# Altium PCB PCB1.PcbDoc
Units mil, origin at the board's own origin, x right, y up, seen from the top; angles counter-clockwise.
Board outline 6000 x 4000 mil, 2 copper layers (Top Layer, Bottom Layer); 85 components, 86 nets, 277 pads, 0 vias.
Unrouted connection lines stored in the file: 182.
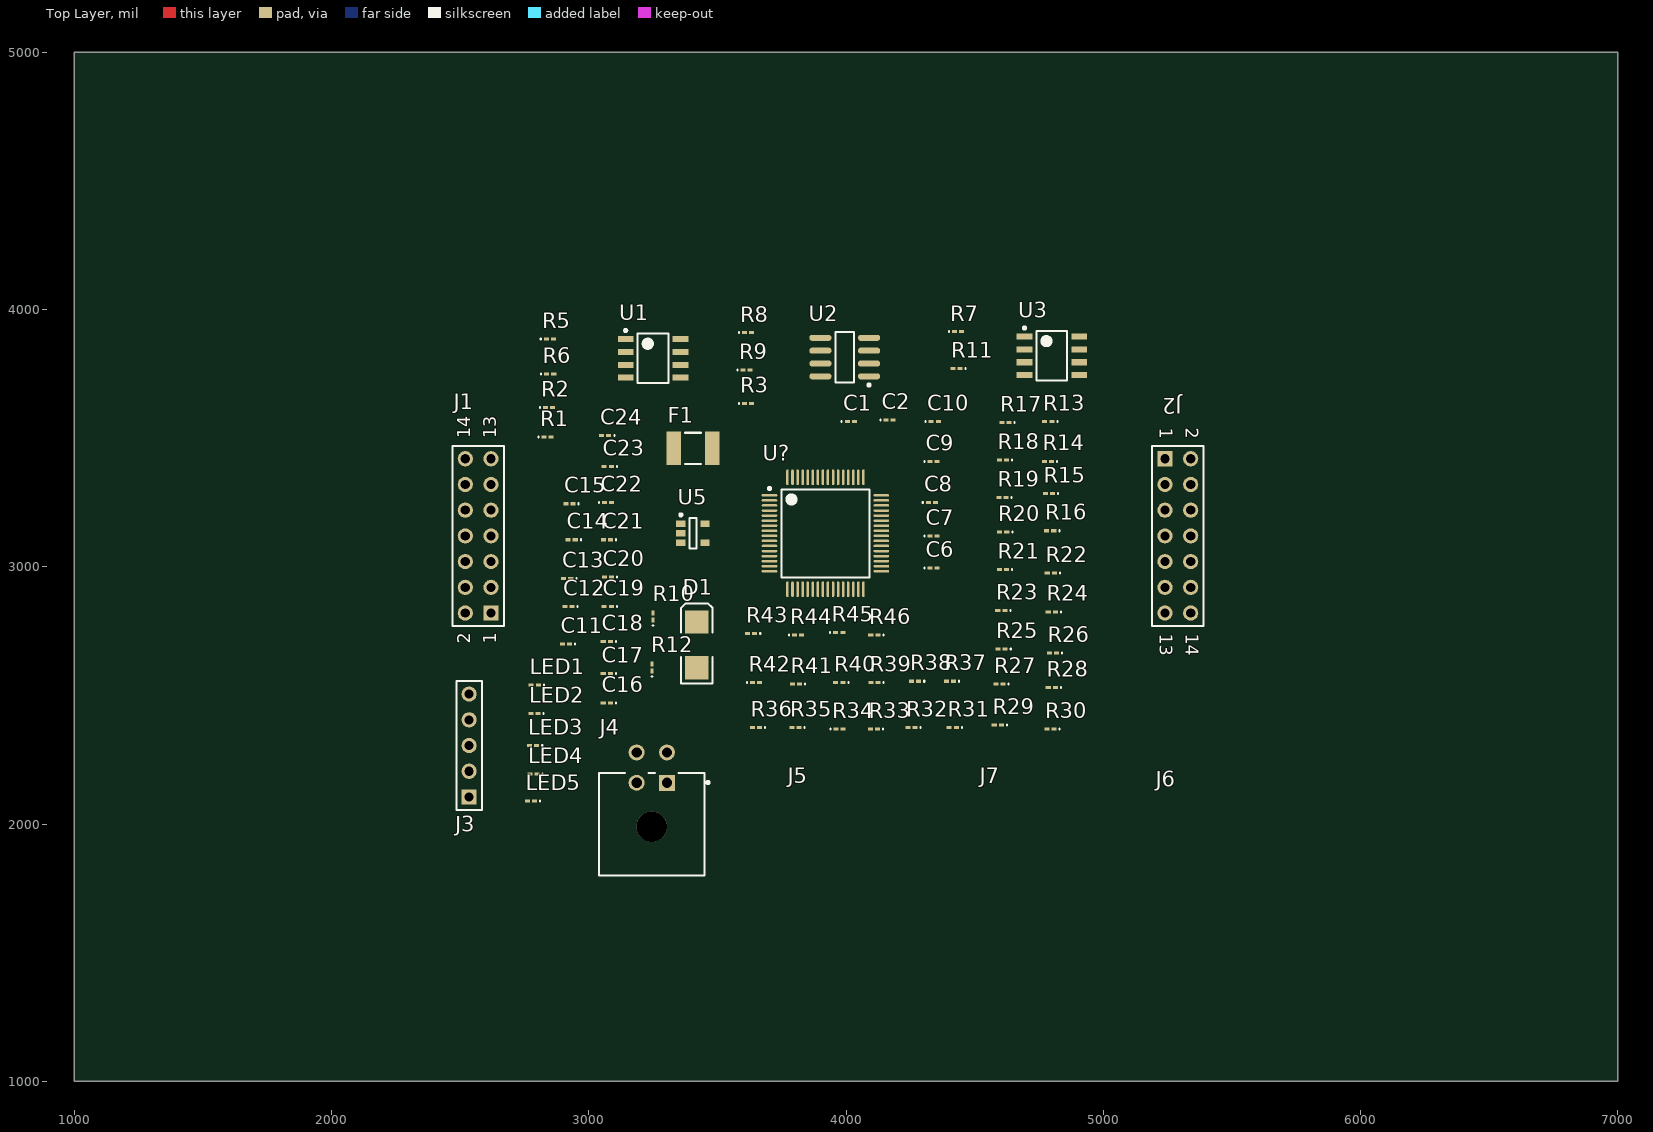
[diagram p0: Top Layer view]
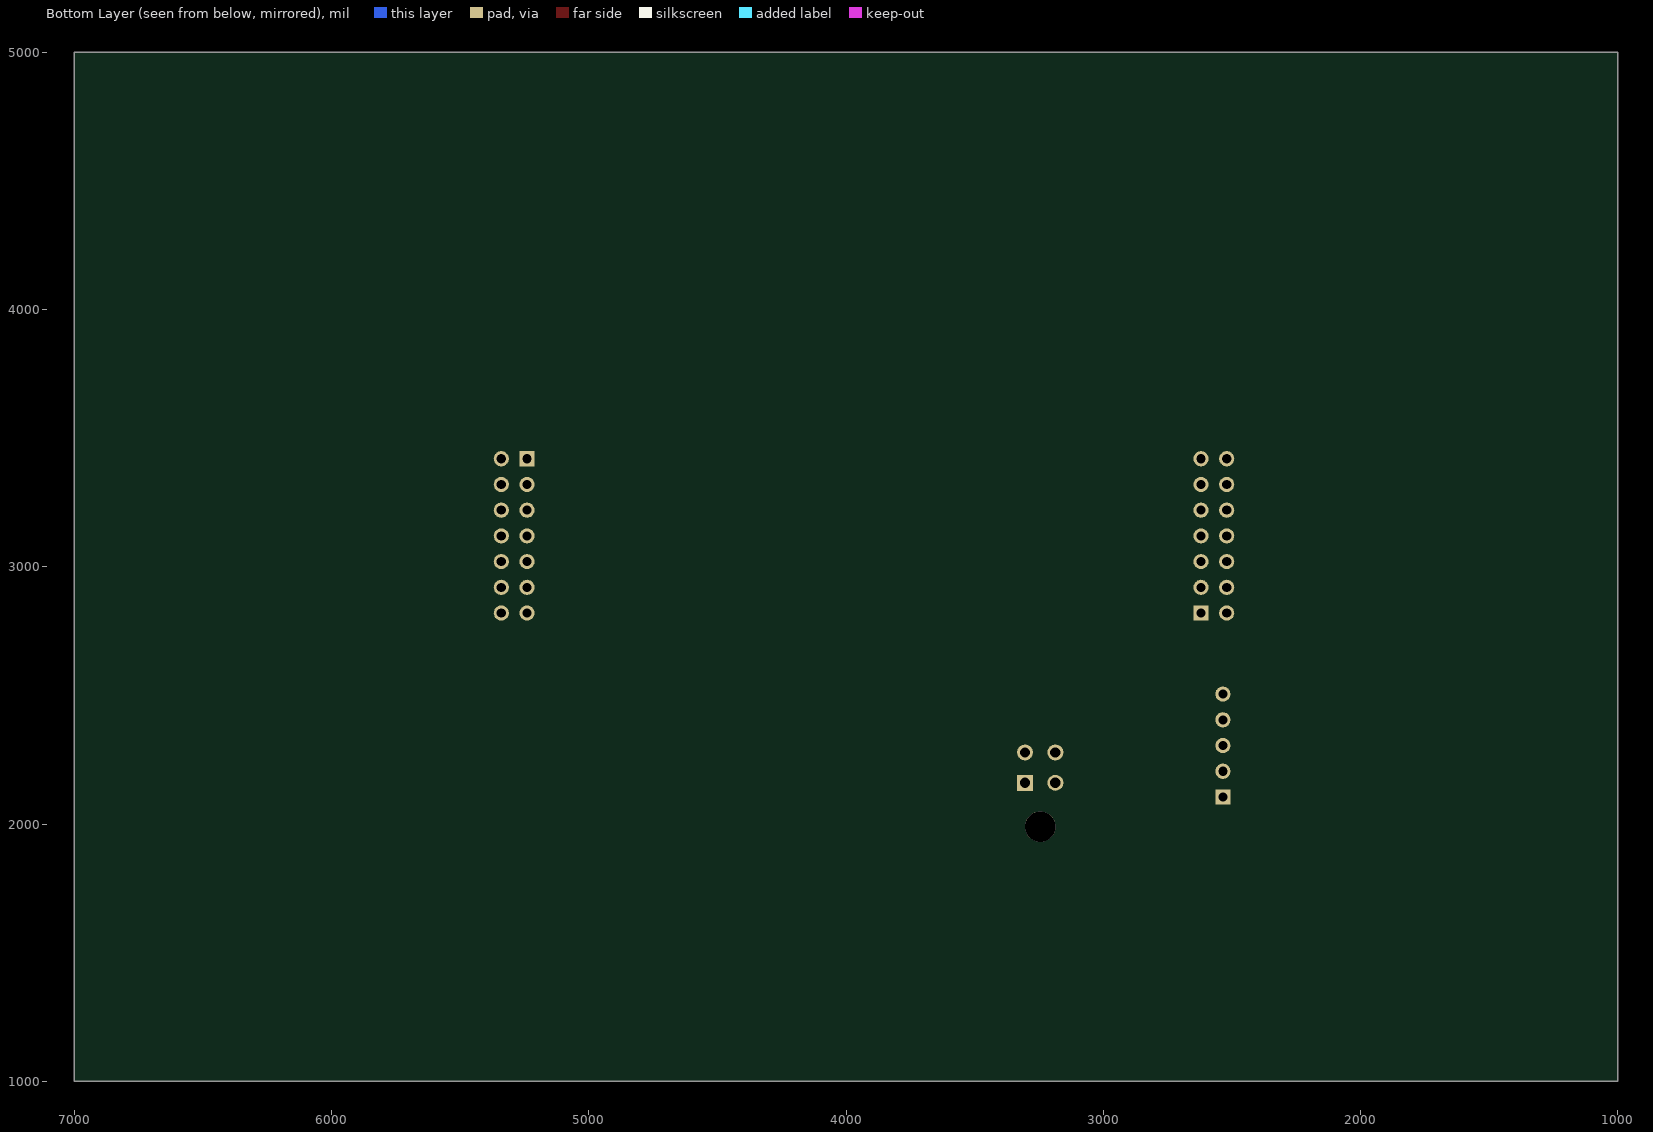
[diagram p1: Bottom Layer view, seen from below]

## Layer stack, top to bottom
Top Solder: solder mask 0.4, Solder Resist, Dk 3.5
Top Layer: signal copper 1.4
Dielectric 1: dielectric 12.6, FR-4, Dk 4.8
Bottom Layer: signal copper 1.4
Bottom Solder: solder mask 0.4, Solder Resist, Dk 3.5

## Board outline
1000,1000 7000,1000 7000,5000 1000,5000

## Design rules (kind name [scope] priority, off if disabled: settings)
Clearance [All] p1: gap=10 ignorepadtopadclearanceinfootprint=FALSE except(0: Arc-Hole Track-Hole SMDPad-Hole THPad-Hole Via-Hole Fill-Hole Poly-Hole Region-Hole Text-Hole)
PolygonConnect [All] p1: connectstyle=Relief reliefconductorwidth=10 reliefentries=4 polygonreliefangle="90 Angle" airgapwidth=10
RoomDefinition LAB2 [InComponentClass('LAB2')] p1: confinementstyle=ConfineIn formatcopy=TRUE lockcomponents=FALSE outline 7045,1060 26955,1060 26955,2065 7045,2065
RoutingVias [All] p1: holewidth=28 width=50 viastyle="Through Hole" minholewidth=28 minwidth=50 maxholewidth=28 maxwidth=50
SolderMaskExpansion [All] p1: expansion=4
Width [All] p1: maxlimit=10 minlimit=10 preferedwidth=10
30 further rules are at their usual default settings.

## Components (designator, comment, footprint, x,y, rotation, side; value= is the part's Value field where it differs from the comment)
C1 "100n" 0603 4018.78,3565 r0 top
C2 "4n7" 0603 4168.78,3570 r0 top value=100n
C6 "100n" 0603 4340,2995 r0 top
C7 "100p" 0603 4340,3120 r0 top value=100pF
C8 "100n" 0603 4333.78,3250 r0 top
C9 "4n7" 0603 4340,3410 r0 top value=100n
C10 "100n" 0603 4345,3565 r0 top
C11 "100n" 0603 2911.22,2700 r180 top
C12 "100n" 0603 2921.22,2845 r180 top
C13 "100n" 0603 2916.22,2955 r180 top
C14 "100n" 0603 2933.78,3105 r180 top
C15 "100n" 0603 2925,3245 r180 top
C16 "100n" 0603 3070,2470 r180 top
C17 "27p" 0603 3070,2585 r180 top value=100n
C18 "27p" 0603 3070,2710 r180 top value=100n
C19 "100n" 0603 3073.78,2845 r180 top
C20 "100n" 0603 3075,2960 r180 top
C21 "100n" 0603 3071.22,3105 r180 top
C22 "100n" 0603 3075,3250 r0 top
C23 "100n" 0603 3073.78,3390 r180 top
C24 "10n" 0603 3063.78,3510 r180 top value=100pF
D1 "P6SMB15A" SMB 3420,2696.42 r90 top
F1 "Fuse 1" 1812 3405,3460 r0 top
J1 "Header 7X2" HDR2X7 2620,2820 r90 top
J2 "Header 7X2" HDR2X7 5240,3420 r270 top
J3 "ZL201" HDR1X5 2535,2105 r90 top
J4 "MX-43045-0400" FP-43045-0400-MFG 3245,2003.98 r0 top
J5 "MX-43045-0800" FP-35507-0400-MFG 3980,1960 r0 top
J6 "MX-43045-0600" PCBComponent_1 2580,6310 r90 top
J7 "MX-43045-0600" FP-35507-0400-MFG 4725,1960 r0 top
LED1 "HCL-1904AYL" 0603 2790,2540 r180 top
LED2 "HCL-1903BG4" 0603 2788.78,2430 r180 top
LED3 "HCL-1906BR1" 0603 2783.78,2305 r180 top
LED4 "HCL-1904AYL" 0603 2785,2195 r180 top
LED5 "HCL-1906BR1" 0603 2775,2090 r180 top
R1 "CAN0001" 0603 2840,3505 r0 top
R2 "CAN0001" 0603 2845,3620 r0 top
R3 "nc" 0603 3618.78,3635 r0 top value=1K
R5 "4k7" 0603 2848.78,3885 r0 top value=1K
R6 "1k" 0603 2850,3750 r0 top value=1K
R7 "3k6 1%" 0603 4435,3915 r0 top value=1K
R8 "68" 0603 3618.78,3910 r0 top value=1K
R9 "68" 0603 3613.78,3765 r0 top value=1K
R10 "1M" 0603 3250,2806.22 r90 top value=1K
R11 "1k2 1%" 0603 4430,3770 r180 top value=1K
R12 "4k7" 0603 3245,2608.78 r90 top value=1K
R13 "CAN0001" 0603 4786.22,3565 r180 top
R14 "CAN0001" 0603 4785,3410 r180 top
R15 "1k8" 0603 4788.78,3285 r180 top value=1K
R16 "nc" 0603 4793.78,3140 r180 top value=1K
R17 "4k7" 0603 4620,3560 r180 top value=1K
R18 "1k" 0603 4610,3415 r180 top value=1K
R19 "68" 0603 4608.78,3270 r180 top value=1K
R20 "68" 0603 4611.22,3135 r180 top value=1K
R21 "10k" 0603 4610,2990 r180 top value=1K
R22 "10k" 0603 4796.22,2975 r180 top value=1K
R23 "1k" 0603 4603.78,2830 r180 top value=1K
R24 "4k7" 0603 4800,2825 r180 top value=1K
R25 "10k" 0603 4605,2680 r180 top value=1K
R26 "10k" 0603 4805,2665 r180 top value=1K
R27 "1k" 0603 4596.22,2545 r180 top value=1K
R28 "4k7" 0603 4800,2530 r180 top value=1K
R29 "10k" 0603 4590,2385 r180 top value=1K
R30 "1k8" 0603 4795,2370 r180 top value=1K
R31 "10k" 0603 4415,2375 r180 top value=1K
R32 "1k" 0603 4255,2375 r180 top value=1K
R33 "nc" 0603 4108.78,2370 r180 top value=1K
R34 "4k7" 0603 3975,2370 r0 top value=1K
R35 "4k7" 0603 3803.78,2375 r180 top value=1K
R36 "10k" 0603 3650,2375 r180 top value=1K
R37 "10k" 0603 4403.78,2555 r180 top value=1K
R38 "10k" 0603 4268.78,2555 r180 top value=1K
R39 "470" 0603 4111.22,2550 r180 top value=1K
R40 "1k" 0603 3973.78,2550 r180 top value=1K
R41 "1k" 0603 3805,2545 r180 top value=1K
R42 "4k7" 0603 3650,2550 r0 top value=1K
R43 "10k" 0603 3631.22,2740 r180 top value=1K
R44 "4k7" 0603 3813.78,2735 r0 top value=1K
R45 "4k7" 0603 3973.78,2745 r0 top value=1K
R46 "4k7" 0603 4110,2735 r180 top value=1K
U1 "MCP2551-I/SN" MCHP-SN8_V 3250,3810 r0 top
U2 "MC33063AD" SO8_N 3995,3815 r180 top
U3 "MCP2551-I/SN" MCHP-SN8_V 4800,3820 r0 top
U5 "MCP1320-46LT" SOT23-5L_L 3405,3130 r0 top
U? "DSPIC30F5011-30I/PT" TQFP-PT64_L 3920,3130 r0 top

## Footprints (in the part's own frame and the unit in brackets; to place one, negate y for a bottom-side part, rotate by r counter-clockwise, add the part's x,y. Pads: shape width x height; smd on the part's side, far side on the other; paste and mask are expansions set on the pad)
0603 [mm] "Chip Inductor, Body 0.6x0.3mm, IPC High Density"
  rect 0.5x0.3 smd: 1(-0.35,0) 2(0.35,0)
  silkscreen extent -0.9,-0.05 -0.9,0.05, body extent -0.33,-0.18 0.33,0.18, height 0.55
1812 [mm] "Chip Capacitor, Body 4.5x3.2mm, IPC High Density"
  rect 1.4x3.3 smd: 1(-1.9,0) 2(1.9,0)
  silkscreen extent -0.8,-1.55 0.8,1.55, body extent -2.4,-1.7 2.4,1.7, height 1.4
FP-35507-0400-MFG [mil]
  body extent -212,-163 212,163, height 10
FP-43045-0400-MFG [mm]
  rect 1.57x1.57 hole 1.02 paste-1000 mask+0: 1(1.5,3.965)
  round 1.57 hole 1.02 paste-1000 mask+0: 2(-1.5,3.965) 3(1.5,6.965) 4(-1.5,6.965)
  round 3 hole 3 unplated paste-1000 mask+0: ""(0,-0.355)
  silkscreen extent -5.2,-5.21 5.68,4.95, body extent -5.3,-5.31 5.3,7.85, height 0.25
HDR1X5 [mm] "Connector; Header; 5 Position"
  rect 1.5x1.5 hole 0.9: 1(0,0)
  round 1.5 hole 0.9: 2(2.54,0) 3(5.08,0) 4(7.62,0) 5(10.16,0)
  silkscreen extent -1.27,-1.27 11.43,1.27
HDR2X7 [mm] "Connector; Header; 7x2 Position"
  rect 1.5x1.5 hole 0.9: 1(0,0)
  round 1.5 hole 0.9: 2(0,2.54) 3(2.54,0) 4(2.54,2.54) 5(5.08,0) 6(5.08,2.54) 7(7.62,0) 8(7.62,2.54) 9(10.16,0) 10(10.16,2.54) 11(12.7,0) 12(12.7,2.54) 13(15.24,0) 14(15.24,2.54)
  silkscreen extent -1.27,-1.27 16.51,3.81
MCHP-SN8_V [mm] "SOIC, 8-Leads, Body 4.9x3.9mm, Pitch 1.27mm"
  rect 1.55x0.6 smd: 1(-2.7,1.905) 2(-2.7,0.635) 3(-2.7,-0.635) 4(-2.7,-1.905) 5(2.7,-1.905) 6(2.7,-0.635) 7(2.7,0.635) 8(2.7,1.905)
  silkscreen extent -2.82,-2.45 1.53,2.88, body extent -3,-2.45 3,2.45, height 1.75
PCBComponent_1 [mil]
SMB [mm] "DO-214-AA/SMB; 2 C-Bend Leads; Body 5.3 x 3.6 mm, inc. leads (LxW)"
  rect 2.3x2.3 smd: 1(-2.25,0) 2(2.25,0)
  silkscreen extent -3.8,-1.55 4.1,1.55
SO8_N [mm] "SOIC, 8-Leads, Body 4.9x3.9mm, Pitch 1.27mm, IPC Medium Density"
  oval 2.2x0.6 smd: 1(-2.4,1.905) 2(-2.4,0.635) 3(-2.4,-0.635) 4(-2.4,-1.905) 5(2.4,-1.905) 6(2.4,-0.635) 7(2.4,0.635) 8(2.4,1.905)
  silkscreen extent -2.53,-2.5 0.9,2.88, body extent -2,-2.5 2,2.5, height 1.75
SOT23-5L_L [mm] "SOT23, 5-Leads, Body 2.9x1.6mm, Pitch 0.95mm, Lead Span 2.8mm, IPC High Density"
  rect 0.9x0.65 smd: 1(-1.2,0.95) 2(-1.2,0) 3(-1.2,-0.95) 4(1.2,-0.95) 5(1.2,0.95)
  silkscreen extent -1.32,-1.5 0.35,1.95, body extent -0.87,-1.5 0.87,1.5, height 1.45
TQFP-PT64_L [mm] "Thin QFP, 64-Leads, Body 10x10mm, Pitch 0.5mm, IPC High Density"
  oval 1.55x0.25 smd: 1(-5.525,3.75) 2(-5.525,3.25) 3(-5.525,2.75) 4(-5.525,2.25) 5(-5.525,1.75) 6(-5.525,1.25) 7(-5.525,0.75) 8(-5.525,0.25) 9(-5.525,-0.25) 10(-5.525,-0.75) 11(-5.525,-1.25) 12(-5.525,-1.75) 13(-5.525,-2.25) 14(-5.525,-2.75) 15(-5.525,-3.25) 16(-5.525,-3.75) 33(5.525,-3.75) 34(5.525,-3.25) 35(5.525,-2.75) 36(5.525,-2.25) 37(5.525,-1.75) 38(5.525,-1.25) 39(5.525,-0.75) 40(5.525,-0.25) 41(5.525,0.25) 42(5.525,0.75) 43(5.525,1.25) 44(5.525,1.75) 45(5.525,2.25) 46(5.525,2.75) 47(5.525,3.25) 48(5.525,3.75)
  oval 0.25x1.55 smd: 17(-3.75,-5.525) 18(-3.25,-5.525) 19(-2.75,-5.525) 20(-2.25,-5.525) 21(-1.75,-5.525) 22(-1.25,-5.525) 23(-0.75,-5.525) 24(-0.25,-5.525) 25(0.25,-5.525) 26(0.75,-5.525) 27(1.25,-5.525) 28(1.75,-5.525) 29(2.25,-5.525) 30(2.75,-5.525) 31(3.25,-5.525) 32(3.75,-5.525) 49(3.75,5.525) 50(3.25,5.525) 51(2.75,5.525) 52(2.25,5.525) 53(1.75,5.525) 54(1.25,5.525) 55(0.75,5.525) 56(0.25,5.525) 57(-0.25,5.525) 58(-0.75,5.525) 59(-1.25,5.525) 60(-1.75,5.525) 61(-2.25,5.525) 62(-2.75,5.525) 63(-3.25,5.525) 64(-3.75,5.525)
  silkscreen extent -5.65,-4.35 4.35,4.55, body extent -5,-5 5,5, height 1.6

## Part data
C1 C2 C6 C7 C8 C9 C10 C11 C12 C13 C14 C15 C16 C17 C18 C19 C20 C21 C22 C23 C24: library part Cap, "Capacitor", LatestRevisionDate=17-Jul-2002, LatestRevisionNote="Re-released for DXP Platform.", PackageReference=RAD-0.3, Published=8-Jun-2000, Publisher="Altium Limited"
D1: library part "D Zener", "Zener Diode", LatestRevisionDate=17-Jul-2002, LatestRevisionNote="Re-released for DXP Platform.", PackageReference=DIODE-0.7, Published=8-Jun-2000, Publisher="Altium Limited"
F1: "Fuse", LatestRevisionDate=17-Jul-2002, LatestRevisionNote="Re-released for DXP Platform.", PackageReference=PIN-W2/E2.8, Published=8-Jun-2000, Publisher="Altium Limited"
J1 J2: "Header, 7-Pin, Dual row", LatestRevisionDate=17-Jul-2002, LatestRevisionNote="Re-released for DXP Platform.", Publisher="Altium Limited"
J3: library part CON5, "Connector"
J4: library part "Header 2X2", "Header, 2-Pin, Dual row", LatestRevisionDate=17-Jul-2002, LatestRevisionNote="Re-released for DXP Platform.", Publisher="Altium Limited"
J5: library part "Header 4X2A", "Header, 4-Pin, Dual row", LatestRevisionDate=17-Jul-2002, LatestRevisionNote="Re-released for DXP Platform.", Publisher="Altium Limited"
J6 J7: library part "Header 6", "Header, 6-Pin", LatestRevisionDate=17-Jul-2002, LatestRevisionNote="Re-released for DXP Platform.", Publisher="Altium Limited"
LED1 LED2 LED3 LED4 LED5: library part LED3, "Typical BLUE SiC LED", Published=8-Jun-2000, Publisher="Altium Limited", Revision 1="Jul-2002: Re-released for DXP Platform.", Revision 2="17-Dec-2003: PCB Footprint replaced."
R1 R2 R13 R14: library part "Res Varistor", "Varistor (Voltage-Sensitive Resistor)", LatestRevisionDate=04-Mar-2005, LatestRevisionNote="PCB Footprint replaced.", PackageReference=6-0805, Published=24-Mar-1999, Publisher="Altium Limited"
R3 R5 R6 R7 R8 R9 R10 R11 R12 R15 R16 R17 R18 R19 R20 R21 R22 R23 R24 R25 R26 R27 R28 R29 R30 R31 R32 R33 R34 R35 R36 R37 R38 R39 R40 R41 R42 R43 R44 R45 R46: library part Res2, "Resistor", LatestRevisionDate=17-Jul-2002, LatestRevisionNote="Re-released for DXP Platform.", PackageReference=AXIAL-0.4, Published=8-Jun-2000, Publisher="Altium Limited"
U1 U3: "High Speed CAN Transceiver, 8-Pin Plastic SOIC, Industrial Grade", Code_JEDEC=MS-012, ComponentLink1Description="Manufacturer Link", ComponentLink1URL=http://www.microchip.com, ComponentLink2Description=Datasheet, ComponentLink2URL=http://ww1.microchip.com/downloads/en/DeviceDoc/21667d.pdf, DatasheetVersion=Nov-2003, LatestRevisionDate=13-Apr-2006, LatestRevisionNote="IPC-7351 Footprint Added.", PackageDescription="8-Pin Plastic Narrow Body Small Outline Integrated Circuit 1.27 mm Pitch", PackageReference=SOIC150-8, PackageVersion=Oct-2005, Published=6-Oct-2005, Publisher="Altium Limited"
U2: "DC-to-DC Converter Control Circuit", Code_IPC=SOIC127P600-8, Code_JEDEC=MS-012-AA, ComponentLink1Description="Manufacturer Link", ComponentLink1URL=http://www.onsemi.com/site/products/taxonomy/0,4438,503,00.html, ComponentLink2Description=Datasheet, ComponentLink2URL=http://www.onsemi.com/pub/Collateral/MC34063A-D.PDF, DatasheetVersion=1988, LatestRevisionDate=13-Apr-2006, LatestRevisionNote="IPC-7351 Footprint Added.", PackageDescription="8-Pin Small Outline Integrated Circuit 1.27 mm Pitch", PackageReference=751-02, Published=17-Jul-2002, Publisher="Altium Limited"
U5: library part MCP1320
U?: library part CMP-0044-00148-1, "High-Performance 16-bit Digital Signal Controller, 66 KB Flash, 4 KB SRAM, 1 KB EEPROM, 64-Pin TQFP, Industrial Temperature", Code_JEDEC=MS-026, DatasheetVersion="revH, Jun-2008", PackageDescription="64-Lead Thin Plastic Quad Flat Pack (PT) - 10x10x1mm Body, 2.00mm [TQFP]", PackageReference=TQFP-PT64, PackageVersion="revBB, Aug-2009"

## Nets (pads, with @x,y where several pads share a name; then routed paths per layer and width w, separated by ;. In a path a pad name is that pad's centre, name@x,y a point inside that pad or via, vN(x,y) a via of type N, cw(c..) or ccw(c..) an arc to the next point about the centre after c; other vN are vias at no path point)
+5V: C1.1 C6.1 C8.1 C13.1 C14.1 C15.1 C16.1 C22.1 J1.2 J2.2 J2.4 J2.6 J3.2 J4.2 LED1.1 LED2.1 LED3.1 LED5.1 R7.1 R22.1 R26.1 R31.1 R36.1 R37.1 R38.1 R42.1 R43.2 U1.3 U3.3 U5.5 U?.10 U?.19 U?.26 U?.38 U?.57
+12V: D1.2 F1.2 R10.1 R12.1 U2.6
+12VPWR: F1.1
ADC0: J1.4 U?.16
ADC1: J1.6 U?.15
ADC2: J1.8 U?.14
ADC3: J1.10 U?.13
ADC4: J1.12 U?.12
ButD: C10.1 R22.2 R23.2 U?.23
ButD_IN: R23.1
ButN: C11.1 R26.2 R27.2 U?.22
ButN_IN: R27.1
ButR: C12.1 R31.2 R32.2 U?.21
ButR_IN: R32.1
CAN_BMS_RX: U3.4 U?.58
CAN_BMS_TX: R17.2 U3.1 U?.59
CAN_BMSS_H: R13.2 R20.1 U3.7
CAN_BMSS_L: R14.1 R19.1 U3.6
CAN_MUX_RX: U1.4
CAN_MUX_TX: R5.2 U1.1 U?.60
CAN_MUXED_H: R1.2 R9.1 U1.7
CAN_MUXED_L: R2.1 R8.1 U1.6
ChrgLED: R45.1 U?.29
ChrgLED_OUT: 
FluidHeater: R46.1 U?.30
FluidHeater_OUT: 
GND: C1.2 C2.1 C6.2 C7.1 C8.2 C9.1 C10.2 C11.2 C12.2 C13.2 C14.2 C15.2 C16.2 C17.2 C18.2 C19.2 C20.2 C21.2 C22.2 C23.1 C24.1 J1.14 J2.12 J2.14 J3.3 J4.1 LED4.2 R1.1 R2.2 R6.2 R11.1 R13.1 R14.2 R15.2 R18.2 R24.2 R28.2 R34.2 R35.2 R45.2 R46.2 U1.2 U2.4 U3.2 U5.2 U?.9 U?.20 U?.25 U?.41 U?.56
GPIOC13: J2.3 U?.47
GPIOC14: J2.1 U?.48
GPIOD0: J2.5 U?.46
GPIOD1: J1.13 U?.49
GPIOD2: J1.11 U?.50
GPIOD3: J1.9 U?.51
GPIOD4: J1.7 U?.52
GPIOD5: J1.5 U?.53
GPIOD6: J1.3 U?.54
GPIOD7: J1.1 U?.55
GPIOD8: J2.13 U?.42
GPIOD9: J2.11 U?.43
GPIOD10: J2.9 U?.44
GPIOD11: J2.7 U?.45
GROUND: D1.1
ILUM: J4.4 R34.1
IMP: C19.1 R36.2 R39.2 U?.11
IMP_IN: J4.3 R39.1
IsFHerror: C21.1 R38.2 R41.2 U?.32
IsFHerror_IN: R41.1
IsHeating: C20.1 R37.2 R40.2 U?.31
IsHeating_IN: R40.1
LightD: R24.1 U?.24
LightD_OUT: 
LightN: R28.1 U?.27
LightN_OUT: 
LightR: R35.1 U?.28
LightR_OUT: 
MCLR: J3.1 R44.1 U?.7
NetC2_2: C2.2 R3.2 R8.2 R9.2
NetC7_2: C7.2 U2.3
NetC9_2: C9.2 R16.2 R19.2 R20.2
NetC17_1: C17.1 U?.39
NetC24_2: C24.2 R43.1 U5.3
NetD2_2: U2.2
NetD3_2: R21.2
NetD5_2: R25.2
NetD8_2: R29.2
NetLED1_2: LED1.2 R5.1
NetLED2_2: LED2.2 R15.1
NetLED3_2: LED3.2 R17.1
NetLED4_1: LED4.1 R12.2
NetLED5_2: LED5.2 R30.2
NetQ1_3: R10.2
NetQ4_1: R21.1 R25.1 R29.1
NetR3_1: R3.1 U1.5
NetR4_1: U2.1 U2.7 U2.8
NetR6_1: R6.1 U1.8
NetR7_2: R7.2 R11.2 U2.5
NetR16_1: R16.1 U3.5
NetR18_1: R18.1 U3.8
NetR30_1: R30.1 U?.37
osc2: C18.1 U?.40
PGC: J3.5 U?.17
PGD: J3.4 U?.18
RESET: C23.2 R42.2 R44.2 U5.1
RX: J2.10 U?.34
TX: J2.8 U?.33
WDI: R33.1 U5.4 U?.8
pads on no net: J4. R33.2 U?.1 U?.2 U?.3 U?.4 U?.5 U?.6 U?.35 U?.36 U?.61 U?.62 U?.63 U?.64

## Text inside footprints (layer, text, board x,y; h text height)
J1: Top Overlay "2" at 2540,2700 h50 r90; Top Overlay "1" at 2640,2700 h50 r90; Top Overlay "14" at 2540,3500 h50 r90; Top Overlay "13" at 2640,3500 h50 r90
J2: Top Overlay "2" at 5320,3540 h50 r270; Top Overlay "1" at 5220,3540 h50 r270; Top Overlay "14" at 5320,2740 h50 r270; Top Overlay "13" at 5220,2740 h50 r270